# Altium PCB PCB1 - backup.PcbDoc
Units mm, origin at the board's own origin, x right, y up, seen from the top; angles counter-clockwise.
Board outline 84 x 144 mm, 2 copper layers (Top Layer, Bottom Layer), stack 1.671 mm thick; 11 components, 21 nets, 95 pads, 3 vias.
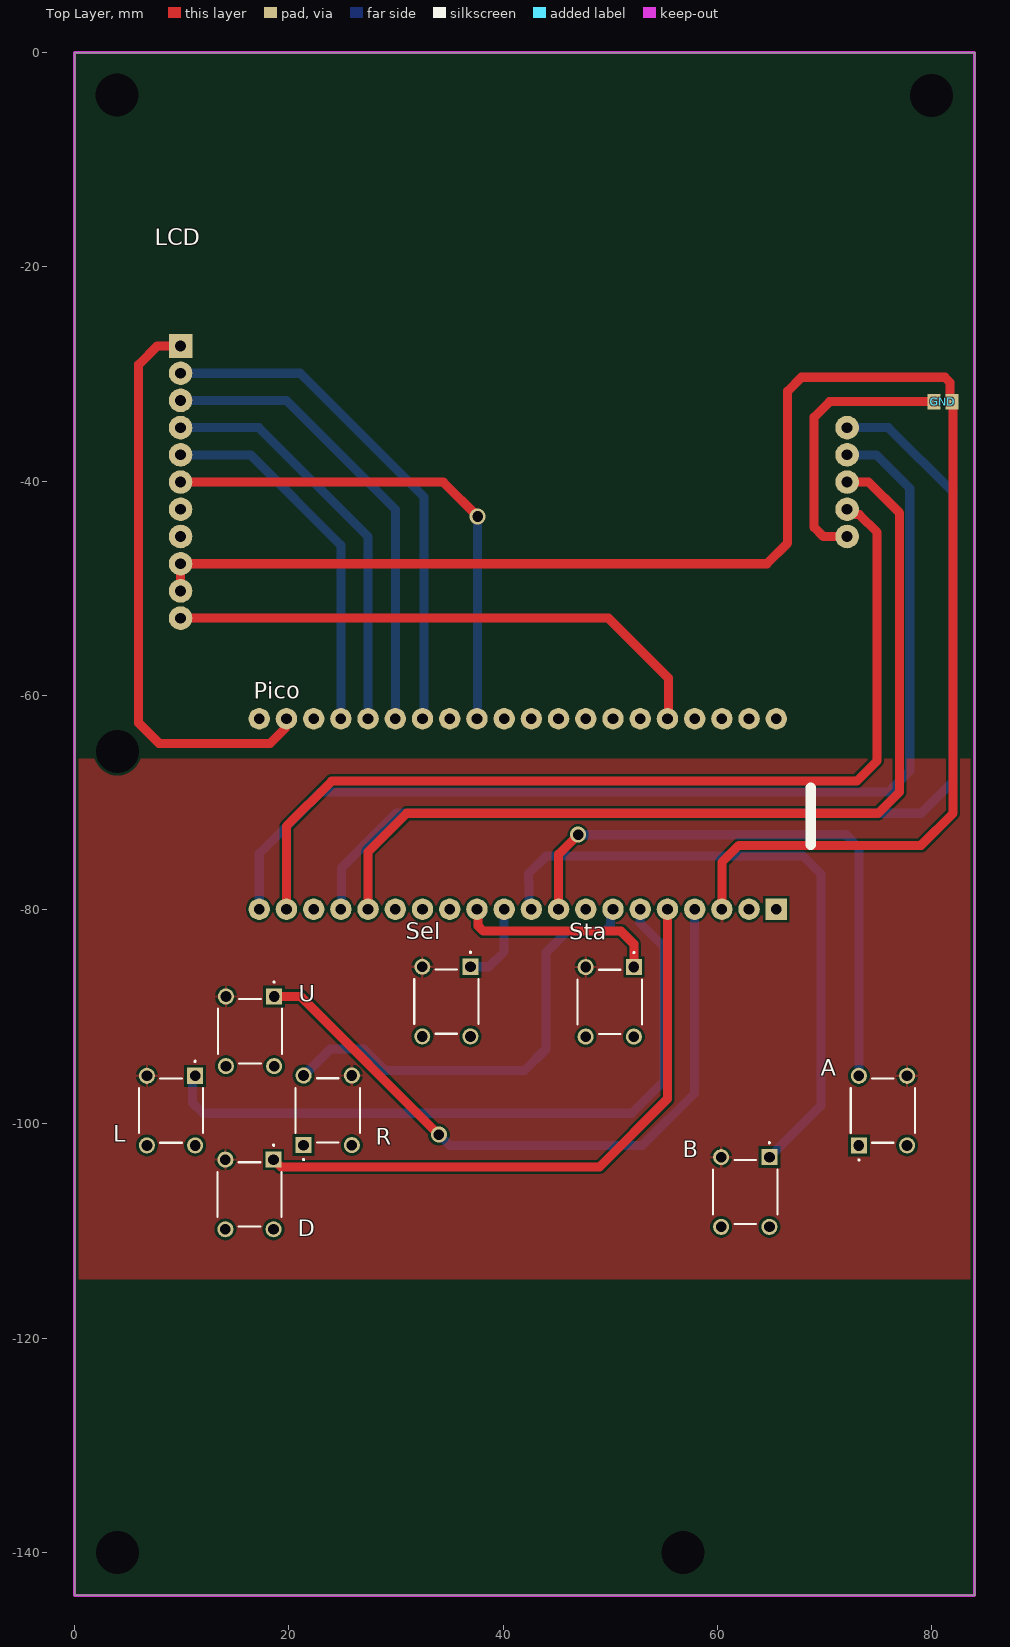
[diagram p0: Top Layer view]
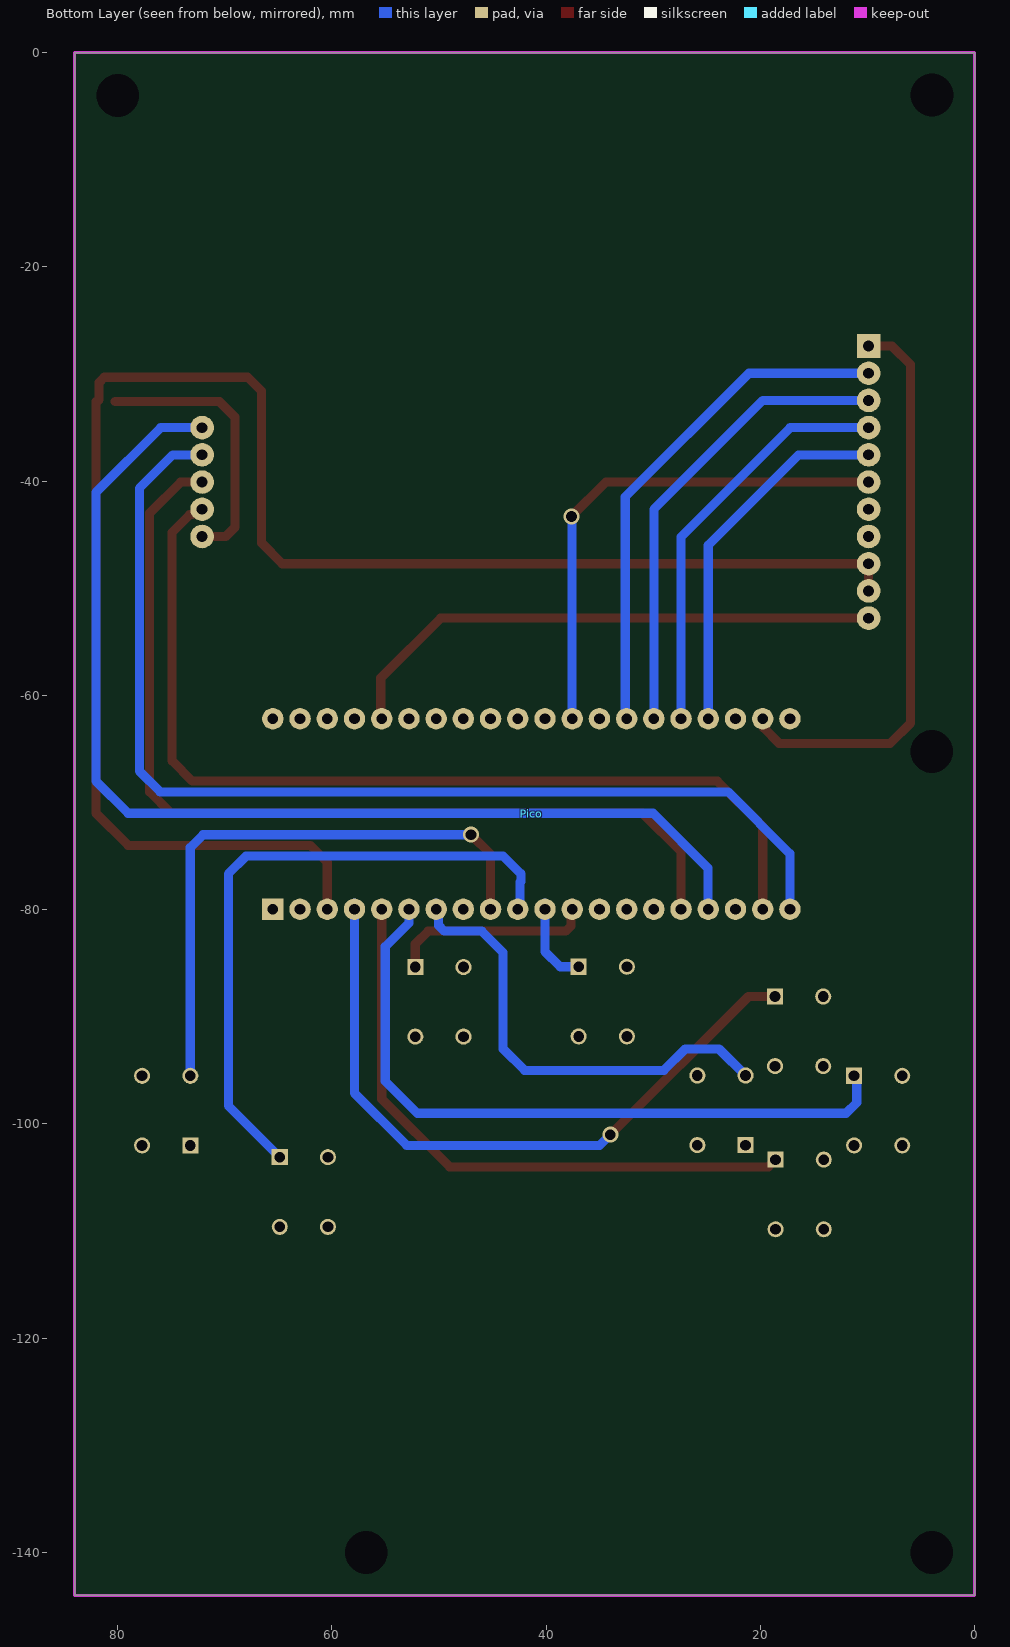
[diagram p1: Bottom Layer view, seen from below]

## Layer stack, top to bottom
Top Solder: solder mask 0.0102, Solder Resist, Dk 3.5
Top Layer: signal copper 0.0356
Dielectric 1: dielectric 1.6, FR-4, Dk 4.8
Bottom Layer: signal copper 0.0356
Bottom Solder: solder mask 0.0102, Solder Resist, Dk 3.5

## Board outline
0,-144 84,-144 84,0 0,0
board region "Default Layer Stack Region": 0,-144 84,-144 84,0 0,0
board region "Default Layer Stack Region": 0,-144 84,-144 84,0 0,0
board region "Default Layer Stack Region": 0,-144 84,-144 84,0 0,0
board region "Default Layer Stack Region": 0,-144 84,-144 84,0 0,0

## Design rules (kind name [scope] priority, off if disabled: settings)
Clearance [All] p1: gap=0.254 ignorepadtopadclearanceinfootprint=FALSE except(0: Arc-Hole Track-Hole SMDPad-Hole THPad-Hole Via-Hole Fill-Hole Poly-Hole Region-Hole Text-Hole)
PolygonConnect [All] p1: connectstyle=Relief reliefconductorwidth=0.254 reliefentries=4 polygonreliefangle="90 Angle" airgapwidth=0.254
RoutingVias [All] p1: holewidth=0.711 width=1.27 viastyle="Through Hole" minholewidth=0.711 minwidth=1.27 maxholewidth=0.711 maxwidth=1.27
SolderMaskExpansion [All] p1: expansion=0.102 istentingtop=FALSE
Width [All] p1: maxlimit=1.5 minlimit=0.254 preferedwidth=0.7 minimp=50.000000 maximp=50.000000 favimp=50.000000
30 further rules are at their usual default settings.

## Components (designator, comment, footprint, x,y, rotation, side; value= is the part's Value field where it differs from the comment)
A "B3F-1052-G" B3F1052G 73.2,-102 r270 top
B "B3F-1052-G" B3F1052G 64.85,-103.1 r90 top
D "B3F-1052-G" B3F1052G 18.575,-103.325 r90 top
GND "RA73F2A10KBTDF" RESC2012X58N 81.05,-32.575 r0 top
L "B3F-1052-G" B3F1052G 11.25,-95.5 r90 top
LCD "Screen 2.2 - Pins" "LCD 2.2''" 9.89,-27.385 r0 top locked
Pico "Pico - Pins" PICO 65.495,-79.955 r90 bottom locked
R "B3F-1052-G" B3F1052G 21.375,-101.975 r270 top
Sel "B3F-1052-G" B3F1052G 36.95,-85.325 r90 top
Sta "B3F-1052-G" B3F1052G 52.2,-85.35 r90 top
U "B3F-1052-G" B3F1052G 18.625,-88.1 r90 top

## Footprints (in the part's own frame and the unit in brackets; to place one, negate y for a bottom-side part, rotate by r counter-clockwise, add the part's x,y. Pads: shape width x height; smd on the part's side, far side on the other; paste and mask are expansions set on the pad)
B3F1052G [mm]
  rect 1.5x1.5 hole 1: 1(0,0)
  round 1.5 hole 1: 2(-6.5,0) 3(0,4.5) 4(-6.5,4.5)
  silkscreen extent -6.25,-0.75 1.4,5.25, body extent -7.1,-0.75 0.6,5.25, height 13.5
"LCD 2.2''" [mm]
  rect 2.2x2.2 hole 1: 1(0,0)
  round 2.2 hole 1: 2(0,-2.54) 3(0,-5.08) 4(0,-7.62) 5(0,-10.16) 6(0,-12.7) 7(0,-15.24) 8(0,-17.78) 9(0,-20.32) 10(0,-22.86) 11(0,-25.4) 12(62.21,-15.24) 13(62.21,-12.7) 14(62.21,-10.16) 15(62.21,-7.62) 16(62.21,-17.78)
PICO [mm]
  rect 2x2 hole 1: 1(0,0)
  round 2 hole 1: 2(0,-2.54) 3(0,-5.08) 4(0,-7.62) 5(0,-10.16) 6(0,-12.7) 7(0,-15.24) 8(0,-17.78) 9(0,-20.32) 10(0,-22.86) 11(0,-25.4) 12(0,-27.94) 13(0,-30.48) 14(0,-33.02) 15(0,-35.56) 16(0,-38.1) 17(0,-40.64) 18(0,-43.18) 19(0,-45.72) 20(0,-48.26) 21(17.78,-48.26) 22(17.78,-45.72) 23(17.78,-43.18) 24(17.78,-40.64) 25(17.78,-38.1) 26(17.78,-35.56) 27(17.78,-33.02) 28(17.78,-30.48) 29(17.78,-27.94) 30(17.78,-25.4) 31(17.78,-22.86) 32(17.78,-20.32) 33(17.78,-17.78) 34(17.78,-15.24) 35(17.78,-12.7) 36(17.78,-10.16) 37(17.78,-7.62) 38(17.78,-5.08) 39(17.78,-2.54) 40(17.78,0)
RESC2012X58N [mm]
  rect 1.2x1.45 smd: 1(-0.85,0) 2(0.85,0)
  body extent -1,-0.63 1,0.63, height 0.58

## Part data
A B D L R Sel Sta U: "Switch", Manufacturer_Name="Omron Electronics", Mouser Part Number=653-B3F-1052-G, Datasheet Link=https://www.mouser.de/datasheet/2/307/omron_omrn-s-a0001309768-1-1770870.pdf, Height=7.5mm, Manufacturer_Part_Number=B3F-1052-G, Mouser Price/Stock=https://www.mouser.co.uk/ProductDetail/Omron-Electronics/B3F-1052-G?qs=82jvyl5dHWcDgqEfj%2F9YaA%3D%3D
GND: "Resistor", Manufacturer_Name="TE Connectivity", Mouser Part Number=279-RA73F2A10KBTDF, Datasheet Link=https://www.mouser.in/datasheet/2/418/8/ENG_DS_1773270_3_A-2899722.pdf, Height=0.58mm, Manufacturer_Part_Number=RA73F2A10KBTDF, Mouser Price/Stock=https://www.mouser.co.uk/ProductDetail/TE-Connectivity-Holsworthy/RA73F2A10KBTDF?qs=Li%252BoUPsLEntqleNaLrqoUg%3D%3D

## Free pads (board coordinates)
  round 1.524 hole 4 unplated: 10(3.975,-3.975) 10(4,-65.222) 10(4,-139.997) 10(56.775,-139.997) 10(79.975,-4)

## Via types
v1: diameter 1.5, hole 1, Top Layer to Bottom Layer, 3 vias

## Nets (pads, with @x,y where several pads share a name; then routed paths per layer and width w, separated by ;. In a path a pad name is that pad's centre, name@x,y a point inside that pad or via, vN(x,y) a via of type N, cw(c..) or ccw(c..) an arc to the next point about the centre after c; other vN are vias at no path point)
GND: A.4 B.3 D.3 GND.2 L.3 LCD.9 LCD.10 Pico.3 R.4 Sel.3 Sta.3 U.3 | length 157.6
  Top Layer w0.85: LCD.10 LCD.9 64.62,-47.705 66.55,-45.775 66.55,-31.6 67.85,-30.3 81.227,-30.3 81.725,-30.798 81.725,-32.4 GND.2 ; Pico.3@60.415,-79.38 60.415,-75.585 62,-74 79,-74 82,-71 GND.2@82,-32.575
NetA_2: A.2 Pico.9 | length 55.1
  Top Layer w0.85: Pico.9@45.175,-79.38 45.175,-74.825 v1(47,-73)
  Bottom Layer w0.85: v1(47,-73) 72,-73 73.2,-74.2 A.2
NetB_1: B.1 Pico.10 | length 60
  Bottom Layer w0.85: Pico.10@42.635,-79.38 42.415,-79.16 42.415,-77.415 42.352,-77.352 42.352,-76.648 44,-75 68,-75 69.65,-76.65 69.65,-98.3 B.1
NetD_1: D.1 Pico.5 | length 57.9
  Top Layer w0.85: D.1 19.25,-104 49,-104 55.335,-97.665 Pico.5@55.335,-79.38
NetGND_1: GND.1 LCD.16 | length 25.5
  Top Layer w0.85: LCD.16 69.89,-45.165 69.025,-44.3 69.025,-34.025 70.475,-32.575 GND.1
NetL_1: L.1 Pico.6 | length 65.5
  Bottom Layer w0.85: L.1 11,-95.75 11,-98 12,-99 52,-99 55,-96 55,-83.45 52.795,-81.245 Pico.6@52.795,-79.705
NetLCD_1: LCD.1 Pico.22 | length 54.7
  Top Layer w0.85: LCD.1 7.715,-27.385 5.975,-29.125 5.975,-62.575 7.875,-64.475 18.25,-64.475 19.691,-63.034 19.691,-61.684 Pico.22@19.775,-61.6
NetLCD_2: LCD.2 Pico.27 | length 47.7
  Bottom Layer w0.85: LCD.2 21.05,-29.925 32.6,-41.475 32.6,-61.475 Pico.27@32.475,-61.6
NetLCD_3: LCD.3 Pico.26 | length 43.2
  Bottom Layer w0.85: LCD.3 19.765,-32.465 29.935,-42.635 Pico.26@29.935,-61.6
NetLCD_4: LCD.4 Pico.25 | length 38.1
  Bottom Layer w0.85: LCD.4 17.205,-35.005 27.395,-45.195 Pico.25@27.395,-61.6
NetLCD_5: LCD.5 Pico.24 | length 34.1
  Bottom Layer w0.85: LCD.5 16.42,-37.545 24.855,-45.98 Pico.24@24.855,-61.6
NetLCD_6: LCD.6 Pico.29 | length 47.4
  Top Layer w0.85: LCD.6 34.41,-40.085 v1(37.625,-43.3)
  Bottom Layer w0.85: Pico.29@37.555,-61.6 37.59,-61.565 37.59,-43.335 v1(37.625,-43.3)
NetLCD_11: LCD.11 Pico.36 | length 51.1
  Top Layer w0.85: LCD.11 49.835,-52.785 55.425,-58.375 55.425,-61.51 Pico.36@55.335,-61.6
NetLCD_12: LCD.12 Pico.19 | length 89.8
  Top Layer w0.85: Pico.19@19.775,-79.38 19.775,-72.225 24,-68 73,-68 74.9,-66.1 74.9,-44.775 73.254,-43.129 72.97,-43.129 72.465,-42.625 LCD.12
NetLCD_13: LCD.13 Pico.16 | length 88.8
  Top Layer w0.85: Pico.16@27.395,-79.38 27.395,-74.605 31,-71 75,-71 77,-69 77,-42.975 74.11,-40.085 LCD.13
NetLCD_14: LCD.14 Pico.20 | length 102
  Bottom Layer w0.85: Pico.20@17.235,-79.38 17.235,-74.765 23,-69 76,-69 77.95,-67.05 77.95,-40.675 74.82,-37.545 LCD.14
NetLCD_15: LCD.15 Pico.17 | length 103.1
  Bottom Layer w0.85: Pico.17@24.855,-79.38 24.895,-79.34 24.895,-76.105 30,-71 79,-71 82,-68 82,-41.05 75.955,-35.005 LCD.15
NetPico_4: Pico.4 U.1 | length 64.8
  Top Layer w0.85: U.1 21.1,-88.1 v1(34,-101)
  Bottom Layer w0.85: v1(34,-101) 35,-102 53,-102 57.875,-97.125 Pico.4@57.875,-79.38
NetPico_7: Pico.7 R.2 | length 43.6
  Bottom Layer w0.85: R.2 23.85,-93 27,-93 29,-95 42,-95 44,-93 44,-84 46,-82 49.502,-82 50.035,-81.467 50.035,-79.6 Pico.7@50.255,-79.38
NetPico_11: Pico.11 Sel.1 | length 8.3
  Bottom Layer w0.85: Sel.1 38.675,-85.325 40.095,-83.905 Pico.11@40.095,-79.38
NetPico_12: Pico.12 Sta.1 | length 19.6
  Top Layer w0.85: Pico.12@37.555,-79.38 37.655,-79.48 37.655,-81.502 38.153,-82 51,-82 52.2,-83.2 Sta.1
pads on no net: A.1 A.3 B.2 B.4 D.2 D.4 L.2 L.4 LCD.7 LCD.8 Pico.1 Pico.2 Pico.8 Pico.13 Pico.14 Pico.15 Pico.18 Pico.21 Pico.23 Pico.28 Pico.30 Pico.31 Pico.32 Pico.33 Pico.34 Pico.35 Pico.37 Pico.38 Pico.39 Pico.40 R.1 R.3 Sel.2 Sel.4 Sta.2 Sta.4 U.2 U.4

## Polygon pours and split planes (outlines as drawn)
GND on Top Layer "NONET_L-01_P-001" (solid, pour order 0): 0,-65.9 84,-65.9 84,-114.5 0,-114.5

## Keep-outs
Keep-Out Layer:
  the board outline again, w0.254

## Silkscreen, mask and mechanical layers (free items; w line width, h text height)
Top Overlay:
  lines w1: 68.7,-73.925 68.7,-68.625
Mechanical 1:
  lines w0.254: 6.775,-98.775 11.275,-98.775 ; 9.025,-102.025 9.025,-95.525 ; 14.075,-106.6 18.575,-106.6 ; 14.075,-91.45 18.575,-91.45 ; 16.325,-109.85 16.325,-103.35 ; 16.325,-94.7 16.325,-88.2 ; 21.375,-98.75 25.875,-98.75 ; 23.625,-102 23.625,-95.5 ; 32.4,-88.6 36.9,-88.6 ; 34.65,-91.85 34.65,-85.35 ; 47.65,-88.6 52.15,-88.6 ; 49.9,-91.85 49.9,-85.35 ; 60.35,-106.375 64.85,-106.375 ; 62.6,-109.625 62.6,-103.125 ; 73.025,-98.75 77.525,-98.75 ; 75.275,-102 75.275,-95.5 ; -0.001,-4 3.999,-4 3.999,0 -0.001,0 -0.001,-4 ; 6.775,-102.025 6.775,-95.525 11.275,-95.525 11.275,-102.025 6.775,-102.025 ; 14.075,-109.85 18.575,-109.85 18.575,-103.35 14.075,-103.35 14.075,-109.85 ; 14.075,-94.7 18.575,-94.7 18.575,-88.2 14.075,-88.2 14.075,-94.7 ; 21.375,-102 25.875,-102 25.875,-95.5 21.375,-95.5 21.375,-102 ; 32.4,-91.85 32.4,-85.35 36.9,-85.35 36.9,-91.85 32.4,-91.85 ; 47.65,-91.85 47.65,-85.35 52.15,-85.35 52.15,-91.85 47.65,-91.85 ; 60.35,-109.625 64.85,-109.625 64.85,-103.125 60.35,-103.125 60.35,-109.625 ; 73.025,-102 77.525,-102 77.525,-95.5 73.025,-95.5 73.025,-102 ; 80,-4 80,0 84,0 84,-4 80,-4

## Dimensions
14.075,-88.2 to 16.325,-109.85 on Mechanical 1
6.775,-98.775 to 25.875,-98.75 on Mechanical 1
9.89,-22.36 to 0,0 on Mechanical 13
9.89,-22.36 to 0,0 on Mechanical 13
14.075,-106.6 to 0,0 on Mechanical 1
16.325,-109.85 to 0,-144 on Mechanical 1
9,-98.75 to 0,0 on Mechanical 1
9.025,-102.025 to 0,-144 on Mechanical 1
23.625,-102 to 0,-144 on Mechanical 1
25.875,-98.75 to 0,0 on Mechanical 1
16.325,-88.2 to 0,-144 on Mechanical 1
14.075,-91.45 to 0,0 on Mechanical 1
34.65,-91.85 to 84,-144 on Mechanical 1
32.4,-88.6 to 84,0 on Mechanical 1
52.15,-88.6 to 84,0 on Mechanical 1
49.9,-85.35 to 84,-144 on Mechanical 1
60.35,-106.375 to 84,0 on Mechanical 1
62.6,-106.35 to 84.002,-107.147 on Mechanical 1
73.025,-98.75 to 84,0 on Mechanical 1
75.275,-102 to 84,-144 on Mechanical 1
9.9,-22.275 to 0,0 on Mechanical 1
9.9,-22.275 to 0,0 on Mechanical 1
84,0 to 85,-144 on Mechanical 1
0,0 to 84,-18 on Mechanical 1